# Allegro board s008_zb_tlsr8258_v001.brd
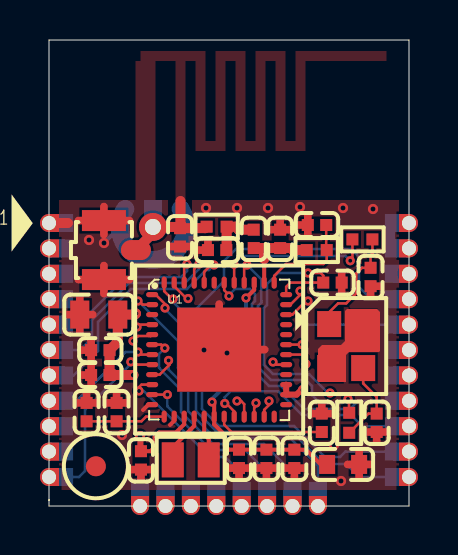
[diagram p0: board, top side]
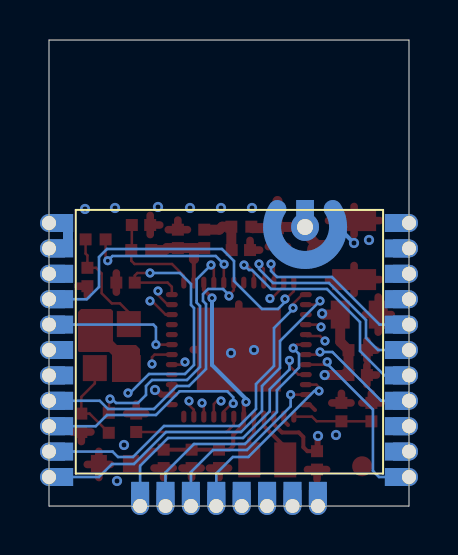
[diagram p1: board, bottom side, seen from below]

Outline 18 x 23.3 mm; copper layers: TOP, L2_GND, L3_POWER, BOTTOM. Coordinates in mm from the lower left corner of the outline.
Outline path: 0,23.3 18,23.3 18,0 0,0 0,23.3

## Placement (name value [footprint] x y rotation side)
C1  103  [C0402]  12.27 2.36 90 top
C2  2.2uF/10V  [C0603]  14.71 2.08 0 top
C3  12pF/50V  [C0402]  16.38 4.16 270 top
C4  12pF/50V  [C0402]  16.08 11.45 270 top
C5  1.2pF/NP0/50V  [C0402]  11.56 13.36 90 top
C6  1.8pF/NP0/50V  [C0402]  8.41 12.8 180 top
C7  1pF/NP0/50V  [C0402]  6.55 13.43 90 top
C8  220pF/NP0/50V  [C0402]  10.24 13.36 270 top
C9  18pF/NP0/50V  [C0402]  13.4 14.05 0 top
C10  105  [C0402]  14.17 11.17 0 top
C11  100pF  [C0402]  2.57 6.55 180 top
C12  104  [C0402]  2.57 7.79 180 top
C13  10uF/16V  [C0805]  2.49 9.57 180 top
C14  105  [C0402]  1.88 4.69 90 top
C15  103  [C0402]  3.38 4.69 270 top
C16  104  [C0402]  4.6 2.28 270 top
C17  104  [C0402]  10.87 2.36 270 top
C18  105  [C0402]  9.5 2.36 90 top
C19  105  [C0402]  13.64 4.16 270 top
J1  -  [JIF_HRS_UFL-R-SMT-1]  2.75 12.8 90 top
J2  ANT_YQ_ZigB  [DS-REX3P_BOT]  5.2 13.95 0 top
L1  47uH  [L0806]  7.09 2.31 180 top
M1  -  [MARK]  2.34 1.99 0 top
NOREF  -  []  0 23.3 0 top
R1  0  [R0402]  15.01 4.16 90 top
R2  0  [R0402]  15.67 13.33 0 top
R3  3.3nH  [R0402]  8.38 13.97 0 top
R4  1.3nH  [R0402]  13.39 12.8 180 top
U1  TLSR8258F512ET48  [QFN_7X7_48PIN_0P5_4P20X4P20]  8.51 7.82 0 top
U2  M_YQ_ZigB  [DS-REX3P]  9 7.8 0 top
Y1  24M_3225  [Y_SMCE3225]  14.86 8 270 top

## Library data of the parts
C1-C10 C12-C19 = C: room: ZB02
C11 = C: room: PWR
J1 = JIF_HRS_UFL-R-SMT-1
J2 = ANT_YQ_ZigB
L1 = L: room: ZB02
M1 = MARK
R1-R4 = R: room: ZB02
U1 = TLSR8258F512ET48: room: ZB02
U2 = M_YQ_ZigB_4
Y1 = 24M_3225: room: ZB02

## Footprints (pads in the part's own frame, mm; a bottom-side part is the same pattern mirrored in y, then rotated)
C0402
  rect 0.6x0.6 smd: 1(-0.46,0) 2(0.46,0)
C0603
  rect 0.8x0.95 smd: 1(-0.8,0) 2(0.8,0)
C0805
  rect 0.95x1.4 smd: 1(-0.95,0) 2(0.95,0)
DS-REX3P
  round 0.9 hole 0.7: 1(-9,6.35) 2(-9,5.08) 3(-9,3.81) 4(-9,2.54) 5(-9,1.27) 6(-9,0) 7(-9,-1.27) 8(-9,-2.54) 9(-9,-3.81) 10(-9,-5.08) 11(-9,-6.35) 12(-4.445,-7.8) 13(-3.175,-7.8) 14(-1.905,-7.8) 15(-0.635,-7.8) 16(0.635,-7.8) 17(1.905,-7.8) 18(3.175,-7.8) 19(4.445,-7.8) 20(9,-6.35) 21(9,-5.08) 22(9,-3.81) 23(9,-2.54) 24(9,-1.27) 25(9,0) 26(9,1.27) 27(9,2.54) 28(9,3.81) 29(9,5.08) 30(9,6.35)
DS-REX3P_BOT
  round 1.4 hole 0.8: 1(0,0)
  round 0.1 smd: 2(-1.63,-0.023)
JIF_HRS_UFL-R-SMT-1
  oval 1x1.5 smd: 1(0,-1.6)
  rect 1.05x2.2 smd: 2(1.475,0) 3(-1.475,0)
L0806
  rect 1.1x1.75 smd: 1(-0.9,0) 2(0.9,0)
MARK
  round 1 smd: 1(0,0)
QFN_7X7_48PIN_0P5_4P20X4P20
  oval 0.6x0.26 smd: 1(-3.35,2.75) 2(-3.35,2.25) 3(-3.35,1.75) 4(-3.35,1.25) 5(-3.35,0.75) 6(-3.35,0.25) 7(-3.35,-0.25) 8(-3.35,-0.75) 9(-3.35,-1.25) 10(-3.35,-1.75) 11(-3.35,-2.25) 12(-3.35,-2.75) 25(3.35,-2.75) 26(3.35,-2.25) 27(3.35,-1.75) 28(3.35,-1.25) 29(3.35,-0.75) 30(3.35,-0.25) 31(3.35,0.25) 32(3.35,0.75) 33(3.35,1.25) 34(3.35,1.75) 35(3.35,2.25) 36(3.35,2.75)
  oval 0.26x0.6 smd: 13(-2.75,-3.35) 14(-2.25,-3.35) 15(-1.75,-3.35) 16(-1.25,-3.35) 17(-0.75,-3.35) 18(-0.25,-3.35) 19(0.25,-3.35) 20(0.75,-3.35) 21(1.25,-3.35) 22(1.75,-3.35) 23(2.25,-3.35) 24(2.75,-3.35) 37(2.75,3.35) 38(2.25,3.35) 39(1.75,3.35) 40(1.25,3.35) 41(0.75,3.35) 42(0.25,3.35) 43(-0.25,3.35) 44(-0.75,3.35) 45(-1.25,3.35) 46(-1.75,3.35) 47(-2.25,3.35) 48(-2.75,3.35)
  rect 4.2x4.2 smd: 49(0,0)
R0402
  rect 0.6x0.6 smd: 1(-0.5,0) 2(0.5,0)
Y_SMCE3225
  rect 1.3x1.2 smd: 1(-1.1,-0.85) 2(1.1,-0.85) 3(1.1,0.85) 4(-1.1,0.85)

## Nets
GND: C1.1 C2.2 C3.2 C4.2 C5.2 C6.2 C7.1 C9.1 C10.2 C11.2 C12.2 C13.2 C14.2 C15.1 C16.2 C17.2 C18.1 C19.1 J1.2(GND#2) J1.3(GND#3) J2.2 U1.12(DVSS#12) U1.14(DVSS#14) U1.49(GND) U2.1(GND1) U2.28(GND2) Y1.2 Y1.4
VCC3V3: C11.1 C12.1 C13.1 C16.1 U1.15(VDD_IO) U1.26(VDD3) U1.27(VDDIO_AMS) U2.29(3V3_26) U2.30(3V3_27)
VDDA1V2: C1.2 C2.1 C17.1 C18.2 U1.18(VDD1V2) U1.39(AVDD1V2)
/M4_RST: C10.1 U1.36(RESETB) U2.15(RST_36)
GPIO_PA0: U1.2(DMIC_DI/P0N/URX/A[0]) U2.20(PA0_2)
GPIO_PA2: U1.4(DO/UTX/P0/A[2]) U2.25(PA2_4)
GPIO_PA3: U1.5(DI/UCTS/P1/A[3]) U2.24(PA3_5)
GPIO_PA5: U1.7(DM/A[5]) U2.8(PA5_7)
GPIO_PA6: U1.8(DP/A[6]) U2.11(PA6_8)
GPIO_PB2: U1.20(P5/UCTS/CYC2LNA/B[2]) U2.22(PB2_20)
GPIO_PB3: U1.21(P0N/URTS/CYC2PA/B[3]) U2.9(PB3_21)
GPIO_PB4: U1.22(SDMP0/P4/B[4]) U2.12(PB4_22)
GPIO_PB5: U1.23(SDMN0/P5/B[5]) U2.10(PB5_23)
GPIO_PC1: U1.29(I2CCK/P1N/P0/PGAN0/C[1]) U2.14(PC1_29)
GPIO_PC2: U1.30(P0/7816TRX/I2CSDA/32KO/PGAP1/C[) U2.13(PC2_30)
GPIO_PC3: U1.31(P1/URX/I2CCK/32KI/PGAN1/C[3]) U2.26(PC3_31)
GPIO_PC6: U1.34(CYC2LNA/ATSEL1/P4N/C[6]) U2.3(PC6_34)
GPIO_PC7: U1.35(CYC2PA/ATSEL2/P5N/C[7]) U2.2(PC7_35)
GPIO_PD0: U1.42(CYC2LNA/7816TRX/D[0]) U2.23(PD0_42)
GPIO_PD2: U1.44(CN/I2SLR/P3/D[2]) U2.7(PD2_44)
GPIO_PD3: U1.45(P1N/I2SSDI/7816TRX/D[3]) U2.6(PD3_45)
GPIO_PD4: U1.46(SWM/I2SSDO/P2N/D[4]) U2.5(PD4_46)
GPIO_PD5: U1.47(P0/P0N/D[5]) U2.4(PD5_47)
GPIO_PD6: U1.48(CN/URX/ATSEL0/D[6]) U2.27(PD6_48)
GPIO_PD7: U1.1(CK/I2SBCK/7816TRX/D[7]) U2.21(PD7_1)
SWDCLK: U1.6(CK/URTS/P2/A[4]) U2.18(SWCLK_6)
SWS: U1.9(SWS/URTS/A[7]) U2.19(SWDS_9)
UART0_RX: U1.11(P4/UTX/ATSEL2/B[1]) U2.17(PB1_11)
UART0_TX: U1.10(P3/URX/ATSEL1/B[0]) U2.16(PB0_10)
XTAL1: R2.1 U1.41(XC2)
XTAL2: R1.2 U1.40(XC1)
N112510: C4.1 R2.2 Y1.1
N112582: C3.1 R1.1 Y1.3
N112666: L1.1 U1.17(VDCDC)
N112714: C7.2 J1.1(IN) J2.1 R3.1
N112756: C14.1 C15.2 U1.13(VDD1V)
N112948: C19.2 U1.19(VDD_F)
N113010: L1.2 U1.16(VDCDC_SW)
N113036: C6.1 C8.1 R3.2
N113040: C5.1 C8.2 R4.2 U1.38(ANT)
N113048: C9.2 R4.1 U1.37(VANT)

Pads without a net: M1 1; U1 3 24 25 28 32 33 43

## Via types
v1: diameter 0.457, hole 0.203, TOP to BOTTOM, 33 vias
v2: diameter 0.508, hole 0.254, TOP to BOTTOM, 17 vias

## Routing (per net, layer and track width the routed paths; a pad name or vN(x,y) marks a point on that pad's centre or on a via; arc(x,y) is an arc through that point)
GND: length 44.3
  TOP w0.2: 4.7,4.8 4.97,5.07 U1.12 ; 6.05,4.05 6.26,4.26 U1.14
  TOP w0.381: C16.2 5.08,1.82 ; C16.2 4.6,1.34 ; C16.2 4.12,1.82 ; 15.51,1.43 C2.2 ; C2.2 16.08,2.08 ; C2.2 15.51,2.73 ; C2.2 14.93,2.08 ; 9.5,1.42 C18.1 ; C18.1 9.02,1.9 ; C18.1 9.98,1.9 ; J1.2 2.75,14.97 ; J1.2 1.47,14.27 ; J1.2 4.02,14.27 ; J1.2 2.75,13.57 ; C19.1 14.12,4.62 ; C19.1 13.64,5.1 ; C19.1 13.16,4.62 ; 1.54,8.69 C13.2 ; C13.2 0.89,9.57 ; C13.2 2.19,9.57 ; C13.2 1.54,10.45 ; 1.63,7.79 C12.2 ; C12.2 2.11,7.31 ; C12.2 2.11,8.27 ; 10.39,1.9 C17.2 ; C17.2 10.87,1.42 ; C17.2 11.35,1.9 ; U1.49 10.79,7.82 ; U1.49 7.77,7.82 ; U1.49 8.51,10.1 ; 1.63,6.55 C11.2 ; C11.2 2.11,7.03 ; C11.2 2.11,6.07 ; 16.38,3.22 C3.2 ; C3.2 15.9,3.7 ; C3.2 16.86,3.7 ; C5.2 11.56,14.29 ; C5.2 12.04,13.82 ; C5.2 11.08,13.82 ; J1.3 2.75,12.02 ; J1.3 1.47,11.32 ; J1.3 2.75,10.62 ; J1.3 4.02,11.32 ; C9.1 12.94,14.53 ; C9.1 12.94,13.57 ; C9.1 12.46,14.05 ; 12.27,1.42 C1.1 ; C1.1 11.79,1.9 ; C1.1 12.75,1.9 ; 1.4,5.15 C14.2 ; C14.2 2.36,5.15 ; C14.2 1.88,5.63 ; 16.08,10.51 C4.2 16.56,10.99 ; 7.03,12.97 C7.1 6.08,12.97 ; 2.9,5.15 C15.1 ; C15.1 3.86,5.15 ; C15.1 3.38,5.63 ; 14.63,11.65 C10.2 14.63,10.69 ; 7.47,12.8 C6.2 7.95,13.27
  TOP w0.5: U2.1 0.95,14.15 ; 6.58,15.25 6.58,13.85
  BOTTOM w0.2: J2.2 3.53,13.93 v2(2.75,13.15)
  vias: v2(2,13.3) v2(3.65,3.55) v2(7.85,14.9) v2(7.75,7.8) v2(8.9,7.65) v2(9.4,14.9) v2(10.95,14.9) v2(12.55,14.95) v2(14.25,3.05) v2(14.6,1.25) v2(14.7,14.9) v2(16.2,14.85)
VCC3V3: length 41.5
  TOP w0.2: U1.15 6.76,4.09 6.35,3.68 5.51,3.68 5.28,3.45 5.28,2.94 5.08,2.74 C16.1
  TOP w0.3: v2(4.55,3.5) 4.57,3.48 4.57,2.77 C16.1 ; v2(12.7,5.8) 12.61,5.8 12.38,5.57 U1.26 U1.27
  TOP w0.5: v2(4.34,9.62) 4.29,9.57 C13.1 3.44,8.21 C12.1 C11.1 v2(4.22,6.55)
  L3_POWER w0.3: v2(4.22,6.55) 3.9,6.23 3.9,4.1 4.5,3.5 v2(4.55,3.5)
  L3_POWER w0.5: v2(4.34,9.62) 4.37,9.6 4.75,9.6 5.1,9.25 13.05,9.25 14.02,10.22 14.02,13.17 15,14.15 U2.30 ; v2(4.22,6.55) 11.55,6.55 12.3,5.8 v2(12.7,5.8)
  BOTTOM w0.5: 17.05,13.85 17.05,13.1
VDDA1V2: length 14.8
  TOP w0.2: C2.1 13.59,2.08 12.85,2.81 12.27,2.81 C1.2 C17.1 C18.2 8.98,2.82 8.79,3.01 8.79,3.55 8.26,4.08 U1.18 8.26,5.09 v1(8.15,5.2) ; U1.39 10.26,10.81 v1(9.85,10.4)
  BOTTOM w0.2: v1(8.15,5.2) 8.15,5.35 9.85,7.05 v1(9.85,10.4)
/M4_RST: length 24.2
  TOP w0.127: U1.36 11.86,10.96 12.07,11.17 C10.1 13.71,11.52 13.59,11.65 v1(12.95,11.65)
  L3_POWER w0.127: U2.15 8.37,2.21 9,2.85 12.85,2.85 13.75,3.75 13.75,5.57 13.83,5.65 v1(14.05,5.65)
  BOTTOM w0.127: v1(14.05,5.65) 13.95,5.65 13,6.6 11.2,6.6 10.75,7.05 10.75,9.9 10.9,10.05 10.9,11.1 11.45,11.65 v1(12.95,11.65)
GPIO_PA0: length 19.5
  TOP w0.127: v1(4.45,10.25) 4.5,10.25 4.68,10.07 U1.2
  BOTTOM w0.127: v1(4.45,10.25) 6.45,8.25 6.45,6.9 7.35,6 7.35,4.75 8.4,3.7 12.15,3.7 13.75,2.1 14.85,2.1 15.5,1.45 U2.20
GPIO_PA2: length 14.9
  TOP w0.127: U1.4 4.52,9.07 v1(4.4,8.95)
  L3_POWER w0.127: U2.25 14,7.8 13,8.8 4.85,8.8 4.7,8.95 v1(4.4,8.95)
GPIO_PA3: length 15.8
  TOP w0.127: v1(4.2,8.25) 4.45,8.5 5.09,8.5 5.16,8.57 U1.5
  L3_POWER w0.127: v1(4.2,8.25) 4.45,8.5 12.9,8.5 14.87,6.53 U2.24
GPIO_PA5: length 6.2
  TOP w0.127: U1.7 4.58,7.57 v1(4.45,7.7)
  BOTTOM w0.127: U2.8 1.39,5.26 3.83,7.7 v1(4.45,7.7)
GPIO_PA6: length 9.5
  TOP w0.127: v1(4.09,7.21) 4.23,7.07 U1.8
  BOTTOM w0.127: v1(4.09,7.21) 4.09,7.11 1.8,4.82 1.8,1.75 1.5,1.45 U2.11
GPIO_PB2: length 11.3
  TOP w0.127: U1.20 9.26,4.73 8.86,5.13 v1(8.79,5.13)
  BOTTOM w0.127: v1(8.79,5.13) 8.79,5.44 9.09,5.74 11.46,5.74 12.65,4.55 15.1,4.55 15.66,3.99 U2.22
GPIO_PB3: length 12
  TOP w0.127: U1.21 9.76,5.1 9.6,5.25 v1(9.4,5.25)
  L3_POWER w0.127: v1(9.4,5.25) 9.43,5.25 9.43,5.09 8.77,4.43 6.83,4.43 5.4,3 2.05,3 1.06,3.99 U2.9
GPIO_PB4: length 9.5
  TOP w0.127: U1.22 10.26,4.91 10.4,5.05 10.35,5.05 v1(10.35,5.15)
  L3_POWER w0.127: U2.12 4.55,1.3 6.95,3.7 9,3.7 10.35,5.05 v1(10.35,5.15)
GPIO_PB5: length 13.5
  TOP w0.127: U1.23 10.76,4.81 11,5.05 v1(11,5.25)
  L3_POWER w0.127: U2.10 5.57,2.72 6.95,4.1 8.9,4.1 8.9,4.1 9.86,5.05 9.86,5.46 10,5.6 10.7,5.6 11,5.3 v1(11,5.25)
GPIO_PC1: length 16
  TOP w0.127: U1.29 11.33,7.07 v1(11.2,7.2)
  L3_POWER w0.127: U2.14 7.09,2.4 7.84,3.14 12.73,3.14 13.45,3.87 13.45,7.2 13.05,7.6 11.6,7.6 v1(11.2,7.2)
GPIO_PC2: length 14.7
  TOP w0.127: U1.30 12.72,7.57 12.85,7.44 v1(12.85,7.1)
  L3_POWER w0.127: v1(12.85,7.1) 13.15,6.8 13.15,3.95 12.6,3.4 7.3,3.4 5.83,1.93 U2.13
GPIO_PC3: length 7.1
  TOP w0.127: U1.31 v1(12.65,8.07)
  BOTTOM w0.127: v1(12.65,8.07) 12.65,8.94 12.78,9.07 U2.26
GPIO_PC6: length 14.9
  TOP w0.127: v1(12.95,10.25) 12.85,10.25 12.17,9.57 U1.34
  L3_POWER w0.127: v1(12.95,10.25) 12.15,10.25 11.2,11.2 3.15,11.2 2.74,11.61 U2.3
GPIO_PC7: length 14.5
  TOP w0.127: U1.35 12.07,10.07 12.55,10.55 v1(12.55,10.75)
  L3_POWER w0.127: v1(12.55,10.75) 12.05,10.75 11.25,11.55 3.18,11.55 1.85,12.88 U2.2
GPIO_PD0: length 15
  TOP w0.127: v1(9,10.5) 9,10.55 8.76,10.79 U1.42
  BOTTOM w0.127: U2.23 15.46,5.26 15.05,4.85 12.75,4.85 11.6,6 11,6 10.15,6.85 10.15,10.1 10.3,10.25 10.3,10.6 10.05,10.85 9.3,10.85 9,10.55 v1(9,10.5)
GPIO_PD2: length 12.6
  TOP w0.127: v1(8.25,12.05) 8.1,12.05 7.76,11.71 U1.44
  BOTTOM w0.127: U2.7 1.23,6.53 2.45,7.75 2.45,9.2 4.1,10.85 6.9,10.85 7.85,11.8 8,11.8 v1(8.25,12.05)
GPIO_PD3: length 11
  TOP w0.127: U1.45 7.26,11.86 v1(7.5,12.1)
  BOTTOM w0.127: v1(7.5,12.1) 7.5,11.85 6.8,11.15 4,11.15 2.15,9.3 2.15,8.4 1.55,7.8 U2.6
GPIO_PD4: length 9.4
  TOP w0.127: U1.46 6.76,11.96 v1(6.9,12.1)
  BOTTOM w0.127: v1(6.9,12.1) 6.9,11.75 6.6,11.45 3.85,11.45 1.47,9.07 U2.5
GPIO_PD5: length 8.7
  TOP w0.127: U1.47 6.26,10.99 6.88,10.37 v1(6.95,10.37)
  L3_POWER w0.127: v1(6.95,10.37) 6.95,10.59 6.65,10.9 3.35,10.9 2.79,10.34 U2.4
GPIO_PD6: length 16.9
  TOP w0.127: U1.48 5.76,10.74 6.15,10.35 v1(6.2,10.35)
  BOTTOM w0.127: v1(6.2,10.35) 6.2,10.2 6.55,9.85 7.35,9.85 8.75,11.25 8.75,12.25 9.35,12.85 15.1,12.85 15.5,12.45 15.5,10.95 16.11,10.34 U2.27
GPIO_PD7: length 18.5
  TOP w0.127: v1(5.8,9.9) 5.8,9.85 5.85,9.85 5.85,10.05 5.33,10.57 U1.1
  BOTTOM w0.127: v1(5.8,9.9) 5.8,9.85 5.85,9.85 5.85,9.8 6.75,8.9 6.75,7 7.65,6.1 7.65,4.85 8.5,4 12.25,4 13.8,2.45 14.55,2.45 14.82,2.72 U2.21
SWDCLK: length 12.7
  TOP w0.127: U1.6 5.62,8.07 v1(5.79,7.89)
  BOTTOM w0.127: v1(5.79,7.89) 5.5,7.6 5.5,6.92 5.7,6.72 5.7,6.7 6.6,5.8 6.6,4.7 8.2,3.1 10.75,3.1 12.18,1.68 12.18,0.3
SWS: length 13.6
  TOP w0.127: v1(5.98,7.28) 6.02,7.24 6.02,7.06 5.53,6.57 U1.9
  BOTTOM w0.127: 13.45,0.3 13.45,2 12.05,3.4 8.3,3.4 6.96,4.74 6.96,5.84 5.98,6.82 v1(5.98,7.28)
UART0_RX: length 9.1
  TOP w0.127: U1.11 v1(5.92,5.57)
  BOTTOM w0.127: v1(5.92,5.57) 5.92,4.98 8.1,2.8 9.8,2.8 10.9,1.7 10.9,0.3
UART0_TX: length 9.1
  TOP w0.127: v1(4.5,5.75) 4.5,5.94 4.63,6.07 U1.10
  BOTTOM w0.127: v1(4.5,5.75) 4.74,5.75 8.04,2.45 8.81,2.45 9.63,1.62 9.63,0.3
XTAL1: length 8.1
  TOP w0.127: v1(15.06,12.26) 15.17,12.37 R2.1 ; v1(9.25,12.09) 9.26,12.07 U1.41
  BOTTOM w0.127: v1(9.25,12.09) 9.66,12.5 14.83,12.5 v1(15.06,12.26)
XTAL2: length 12.7
  TOP w0.127: R1.2 15,4.67 15,5.3 v1(14.95,5.35) ; v1(9.9,12.05) 9.76,11.91 U1.40
  BOTTOM w0.127: v1(14.95,5.35) 14.85,5.35 14.65,5.15 13.55,5.15 13.15,5.55 13.15,6 12.85,6.3 11.1,6.3 10.45,6.95 10.45,10 10.62,10.17 10.62,10.27 10.62,11.33 v1(9.9,12.05)
N112510: length 5.6
  TOP w0.127: Y1.1 14.01,9.69 14.45,10.13 14.86,10.13 15.37,10.64 15.37,11.63 15.65,11.91 C4.1 16.08,12.53 16.17,12.62 R2.2
N112582: length 4.3
  TOP w0.127: R1.1 15.97,4.62 C3.1 16.38,5.46 15.71,6.13 Y1.3
N112666: length 2.3
  TOP w0.2: L1.1 7.99,3.36 7.76,3.59 U1.17
N112714: length 4.2
  TOP w0.5: J1.1 5.2,13.65 J2.1 6.49,13.95 C7.2 7.81,13.89 R3.1
N112756: length 4
  TOP w0.127: U1.13 4.85,4.47 4.62,4.24 3.38,4.24 C15.2 C14.1
N112948: length 5.4
  TOP w0.127: U1.19 8.76,4.06 9.12,3.7 C19.2
N113010: length 2.6
  TOP w0.2: L1.2 6.2,2.32 6.2,2.94 7.26,4 U1.16
N113036: length 2.6
  TOP w0.5: C6.1 8.88,12.81 R3.2 9.33,13.97 9.48,13.82 C8.1
N113040: length 4.4
  TOP w0.2: 10.76,12.35 U1.38
  TOP w0.5: R4.2 12.2,12.8 12.1,12.9 C5.1 10.75,12.9 ; 10.75,12.9 C8.2 ; 10.75,12.9 10.75,12.36 10.76,12.35
N113048: length 5.1
  TOP w0.127: U1.37 11.26,11.51 11.85,12.1 13.72,12.1 13.89,12.26 R4.1 13.86,12.82 C9.2

## Copper pours and planes (outline as drawn; the poured copper is in the pictures)
GND on TOP (solid shape): 16.55,9.7 16.55,7.75 16.5,7.7 15,7.7 14.85,7.55 14.85,6.2 13.45,6.2 13.45,7.85 13.65,8.05 14.6,8.05 14.8,8.25 14.8,9.75 14.9,9.85 16.4,9.85
GND on BOTTOM (solid shape): 1.21,13.7 0,13.7 0,14.6 1.21,14.6
GND on BOTTOM (solid shape): 18,11.16 16.79,11.16 16.79,12.06 18,12.06
GND on TOP: 0.5,0.8 0.5,15.3 5.95,15.3 5.95,14.2 6.05,14.1 7.1,14.1 7.15,14.15 7.15,15.3 17.5,15.3 17.5,13.99 17.5,13.18 17.5,0.8 ; 8 cut-outs
GND on TOP: 4.33,15.25 4.33,22.25 4.58,22.25 4.58,22.75 7.83,22.75 7.83,18.25 8.32,18.25 8.32,22.75 9.82,22.75 9.82,18.25 10.32,18.25 10.32,22.75 11.82,22.75 11.82,18.25 12.32,18.25 12.32,22.75 16.88,22.75 16.88,22.25 12.82,22.25 12.82,17.75 11.32,17.75 11.32,22.25 10.82,22.25 10.82,17.75 9.32,17.75 9.32,22.25 8.82,22.25 8.82,17.75 7.33,17.75 7.33,22.25 6.83,22.25 6.83,15.25 6.33,15.25 6.33,22.25 5.33,22.25 5.33,15.25
GND on L2_GND: 0.5,0.8 0.5,15.3 17.5,15.3 17.5,0.8
GND on L3_POWER: 0.5,0.8 0.5,15.3 17.5,15.3 17.5,13.99 17.5,13.18 17.5,0.8 ; 11 cut-outs
VCC3V3 on BOTTOM (solid shape): 18,13.7 16.79,13.7 16.79,14.6 18,14.6
VCC3V3 on BOTTOM (solid shape): 18,12.43 16.79,12.43 16.79,13.33 18,13.33
/M4_RST on BOTTOM (solid shape): 8.81,0 7.92,0 7.92,1.21 8.81,1.21
GPIO_PA0 on BOTTOM (solid shape): 18,1 16.79,1 16.79,1.9 18,1.9
GPIO_PA2 on BOTTOM (solid shape): 18,7.35 16.79,7.35 16.79,8.25 18,8.25
GPIO_PA3 on BOTTOM (solid shape): 18,6.08 16.79,6.08 16.79,6.98 18,6.98
GPIO_PA5 on BOTTOM (solid shape): 1.21,4.81 0,4.81 0,5.71 1.21,5.71
GPIO_PA6 on BOTTOM (solid shape): 1.21,1 0,1 0,1.9 1.21,1.9
GPIO_PB2 on BOTTOM (solid shape): 18,3.54 16.79,3.54 16.79,4.44 18,4.44
GPIO_PB3 on BOTTOM (solid shape): 1.21,3.54 0,3.54 0,4.44 1.21,4.44
GPIO_PB4 on BOTTOM (solid shape): 5,0 4.11,0 4.11,1.21 5,1.21
GPIO_PB5 on BOTTOM (solid shape): 1.21,2.27 0,2.27 0,3.17 1.21,3.17
GPIO_PC1 on BOTTOM (solid shape): 7.54,0 6.64,0 6.64,1.21 7.54,1.21
GPIO_PC2 on BOTTOM (solid shape): 6.28,0 5.38,0 5.38,1.21 6.28,1.21
GPIO_PC3 on BOTTOM (solid shape): 18,8.62 16.79,8.62 16.79,9.52 18,9.52
GPIO_PC6 on BOTTOM (solid shape): 1.21,11.16 0,11.16 0,12.06 1.21,12.06
GPIO_PC7 on BOTTOM (solid shape): 1.21,12.43 0,12.43 0,13.33 1.21,13.33
GPIO_PD0 on BOTTOM (solid shape): 18,4.81 16.79,4.81 16.79,5.71 18,5.71
GPIO_PD2 on BOTTOM (solid shape): 1.21,6.08 0,6.08 0,6.98 1.21,6.98
GPIO_PD3 on BOTTOM (solid shape): 1.21,7.35 0,7.35 0,8.25 1.21,8.25
GPIO_PD4 on BOTTOM (solid shape): 1.21,8.62 0,8.62 0,9.52 1.21,9.52
GPIO_PD5 on BOTTOM (solid shape): 1.21,9.89 0,9.89 0,10.79 1.21,10.79
GPIO_PD6 on BOTTOM (solid shape): 18,9.89 16.79,9.89 16.79,10.79 18,10.79
GPIO_PD7 on BOTTOM (solid shape): 18,2.27 16.79,2.27 16.79,3.17 18,3.17
SWDCLK on BOTTOM (solid shape): 12.62,0 11.72,0 11.72,1.21 12.62,1.21
SWS on BOTTOM (solid shape): 13.89,0 12.99,0 12.99,1.21 13.89,1.21
UART0_RX on BOTTOM (solid shape): 11.36,0 10.46,0 10.46,1.21 11.36,1.21
UART0_TX on BOTTOM (solid shape): 10.09,0 9.19,0 9.19,1.21 10.09,1.21
GND on BOTTOM (solid shape): 3.94,15.28 4.26,14.85 4.24,14.72 4.19,14.61 5.2,12.75 6.2,14.61 6.34,15.23 6.96,15.09 5.2,11.85 3.43,15.09
N112714 on BOTTOM (solid shape): 5.64,14.36 5.2,13.35 4.75,14.36 4.75,15.3 5.64,15.3

Small or netless copper shapes (teardrops, artwork), in the pictures only: 30 on TOP, 30 on BOTTOM

## Text on the board
Board Geometry/Soldermask Bottom: ZB_TLSR8258 V001 | 2022  10  13
COMPVAL_TYPE_TOP: FIGURE | SIZE | 0.2032 | 0.254 | 0.7 | 0.8 | DRILL CHART: TOP to BOTTOM | ALL UNITS ARE IN MILLIMETERS | PLATED | QTY | 33 | 17 | 30 | 1
